# Altium PCB PCB1.PcbDoc
Units mm, origin at the board's own origin, x right, y up, seen from the top; angles counter-clockwise.
Board outline 16.45 x 26.8 mm, 2 copper layers (Top Layer, Bottom Layer), stack 1.671 mm thick; 25 components, 22 nets, 120 pads, 23 vias.
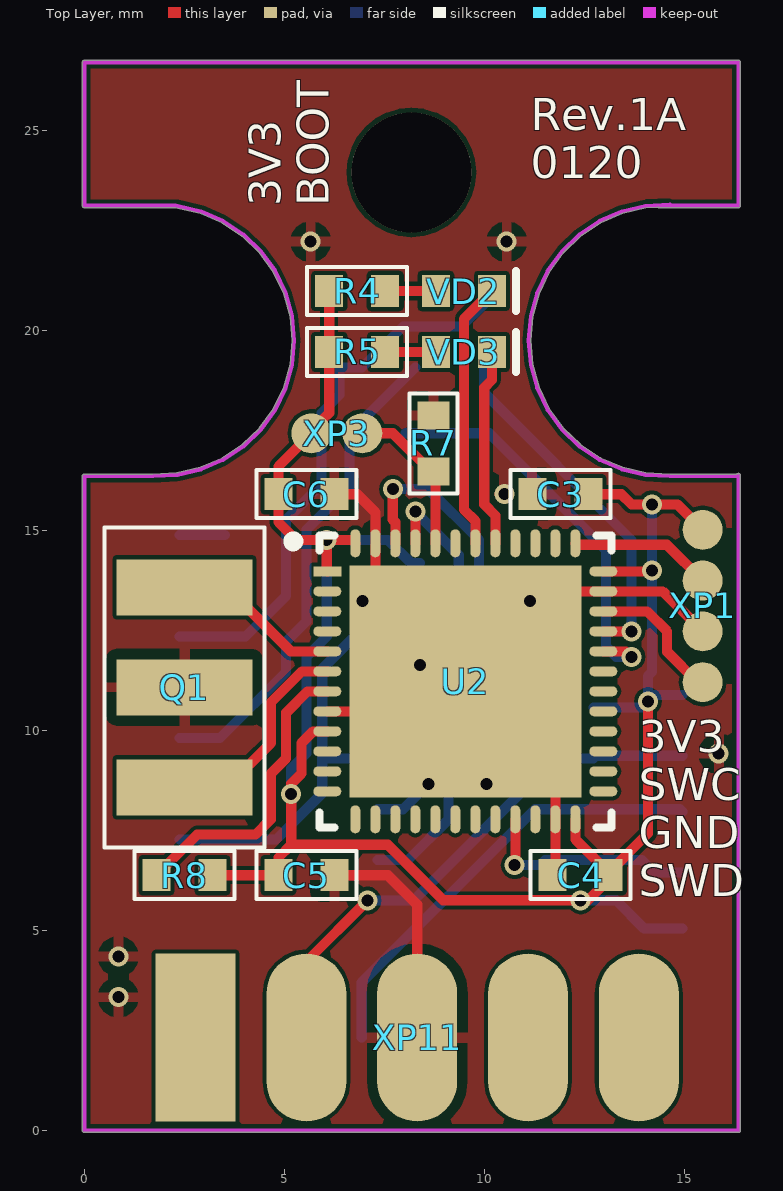
[diagram p0: Top Layer view]
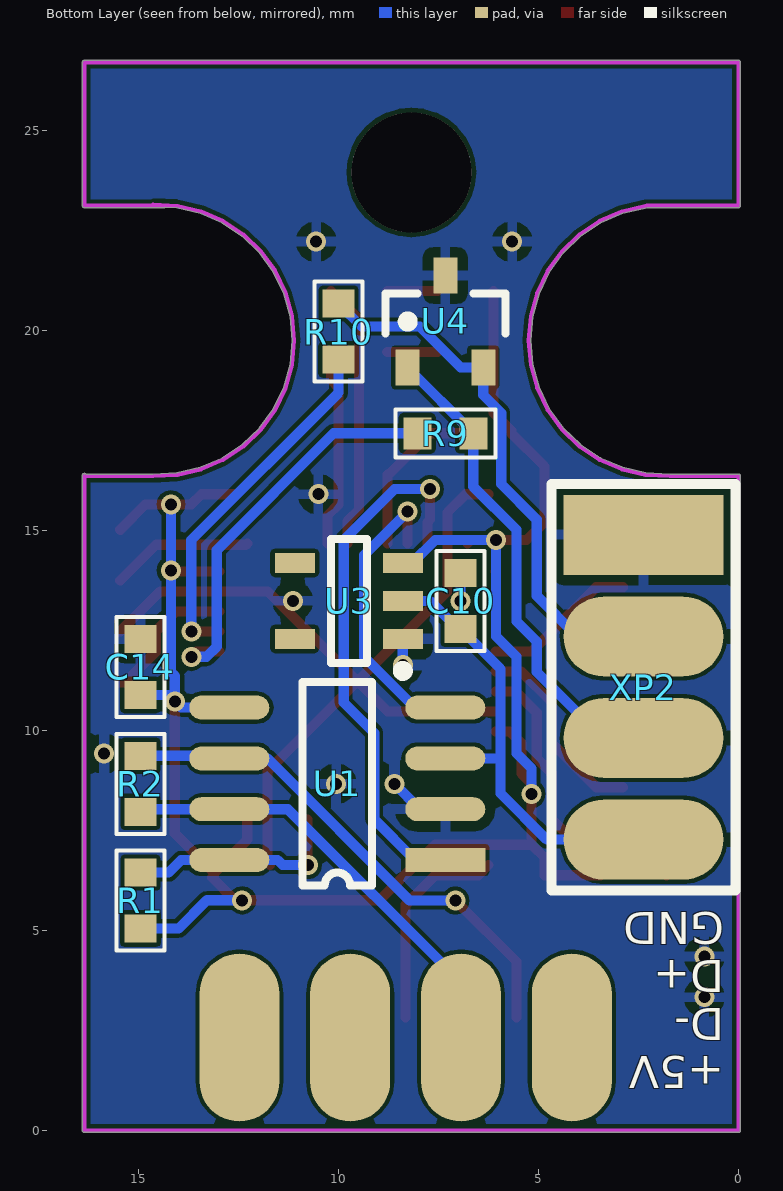
[diagram p1: Bottom Layer view, seen from below]

## Layer stack, top to bottom
Top Solder: solder mask 0.0102, Solder Resist, Dk 3.5
Top Layer: signal copper 0.0356
Dielectric 1: core 1.6, FR-4, Dk 4.2
Bottom Layer: signal copper 0.0356
Bottom Solder: solder mask 0.0102, Solder Resist, Dk 3.5

## Board outline
-0.058,16.358 cw(c-0.008,16.358) -0.008,16.409 1.706,16.409 2.306,16.439 2.888,16.574 3.437,16.811 3.935,17.142 4.365,17.556 4.716,18.04 4.974,18.579 5.132,19.155 5.186,19.75 5.132,20.345 4.974,20.921 4.716,21.46 4.365,21.944 3.935,22.358 3.437,22.689 2.888,22.926 2.267,23.071 -0.008,23.071 cw(c-0.008,23.121) -0.058,23.121 -0.058,26.7 cw(c-0.008,26.7) -0.008,26.75 16.342,26.75 cw(c16.342,26.7) 16.392,26.7 16.392,23.121 cw(c16.342,23.121) 16.342,23.071 14.35,23.071 cw(c14.35,23.121) 14.327,23.076 14.028,23.061 13.446,22.926 12.897,22.689 12.4,22.358 11.969,21.944 11.618,21.46 11.36,20.921 11.202,20.345 11.148,19.75 11.202,19.155 11.36,18.579 11.618,18.04 11.969,17.556 12.4,17.142 12.897,16.811 13.446,16.574 14.028,16.439 14.628,16.409 16.306,16.409 cw(c16.342,16.373) 16.392,16.373 16.392,0 cw(c16.342,0) 16.342,-0.05 -0.008,-0.05 cw(c-0.008,0) -0.058,0

## Design rules (kind name [scope] priority, off if disabled: settings)
BoardOutlineClearance [All] p1: gap=0.254 ignorepadtopadclearanceinfootprint=FALSE except(0: Arc-SplitContinuation Track-SplitContinuation SMDPad-SplitContinuation THPad-SplitContinuation Via-SplitContinuation Fill-SplitContinuation Poly-SplitContinuation Region-SplitContinuation Text-SplitContinuation; 0.1: SMDPad-OutlineEdge SMDPad-CavityEdge Poly-OutlineEdge Poly-CutoutEdge)
Clearance [All] p1: gap=0.1 ignorepadtopadclearanceinfootprint=TRUE except(0: Arc-Hole Track-Hole SMDPad-Hole THPad-Hole Via-Hole Fill-Hole Poly-Hole Region-Hole Text-Hole; 0.254: Fill-Fill Fill-Poly Fill-Region Fill-Text Poly-Poly Poly-Region Poly-Text Region-Region Region-Text Text-Text)
HoleSize [All] p1: absolutevalues=TRUE maxlimit=4 minlimit=0.3 maxpercent=80.000 minpercent=20.000
PolygonConnect [All] p1: connectstyle=Relief reliefconductorwidth=0.254 reliefentries=4 polygonreliefangle="90 Angle" airgapwidth=0.254
RoutingVias [All] p1: holewidth=0.3 width=0.5 viastyle="Through Hole" minholewidth=0.3 minwidth=0.5 maxholewidth=0.5 maxwidth=0.7
SolderMaskExpansion [All] p1: expansion=0.102
Width [All] p1: maxlimit=0.254 minlimit=0.254 preferedwidth=0.254
29 further rules are at their usual default settings.

## Classes and differential pairs
component class USB: R9 R10 U4 XP2
component class PWR: C10 C14 U3
component class MCU: C3 C4 C5 C6 Q1 R4 R5 R7 R8 U2 VD2 VD3 XP1 XP3
component class CAN: R1 R2 U1 XP11

## Components (designator, comment, footprint, x,y, rotation, side; value= is the part's Value field where it differs from the comment)
C3 "100nF" CAP_0603 11.892,15.905 r180 top
C4 "100nF" CAP_0603 12.4,6.38 r180 top
C5 "100nF" CAP_0603 5.542,6.38 r0 top
C6 "100nF" CAP_0603 5.542,15.905 r0 top
C10 "1uF" CAP_0603 6.939,13.238 r90 bottom
C14 "100nF" CAP_0603 14.94,11.587 r90 bottom value=100n
Q1 "CSTCC8M00G53A-R0" CSTCC-CRYSTAL 2.494,11.079 r270 top
R1 "10k" SMD_0603 14.94,5.745 r270 bottom
R2 "120" SMD_0603 14.94,8.666 r270 bottom
R4 "620" SMD_0603 6.812,20.985 r0 top
R5 "620" SMD_0603 6.812,19.461 r0 top
R7 "10k" SMD_0603 8.717,17.175 r270 top
R8 "10k" SMD_0603 2.494,6.38 r0 top
R9 "22" SMD_0603 7.32,17.429 r180 bottom
R10 "22" SMD_0603 9.987,19.969 r90 bottom
U1 "TJA1051" SO8-150mil 7.32,6.761 r0 bottom
U2 "STM32F072C8T6" QFN48-7X7-0.5 9.515,11.227 r0 top
U3 "MC78LC33NTRG" SOT753 9.733,13.238 r0 bottom
U4 "ESDA6V1L" SOT23-3 7.32,20.223 r90 bottom
VD2 "" LED_0603 9.479,20.985 r180 top
VD3 "" LED_0603 9.479,19.461 r180 top
XP1 "CON_4" HEAD_MICRO_SF_1.27-4 15.448,15.016 r270 top
XP2 "CON_4" HEAD-SMD-2.54/4 2.367,14.889 r180 bottom
XP3 "CON_2" HEAD_MICRO_SF_1.27-2 5.669,17.429 r0 top
XP11 "DB9M_CABLE" DSUB-9_M_EDGE 8.312,2.321 r0 top

## Footprints (in the part's own frame and the unit in brackets; to place one, negate y for a bottom-side part, rotate by r counter-clockwise, add the part's x,y. Pads: shape width x height; smd on the part's side, far side on the other; paste and mask are expansions set on the pad)
CAP_0603 [mm]
  rect 0.7x0.8 smd: 1(-0.7,0) 2(0.7,0)
  silkscreen extent -1.25,-0.6 1.25,0.6, body extent -0.8,-0.4 0.8,0.4, height 0.9
CSTCC-CRYSTAL [mm]
  rect 1.4x3.4 smd: 1(-2.5,0) 2(0,0) 3(2.5,0)
  silkscreen extent -4,-2 4,2, body extent -3.6,-1.5 3.6,1.5, height 1.25
DSUB-9_M_EDGE [mm]
  rect 2x4.2 smd: 1(-5.54,0)
  oval 2x4.2 smd: 2(-2.77,0) 3(0,0) 4(2.77,0) 5(5.54,0)
  oval 2x4.2 smd far side: 6(-4.155,0) 7(-1.385,0) 8(1.385,0) 9(4.155,0)
  body extent -15.41,-14.45 15.4,0.65, height 6.21
HEAD-SMD-2.54/4 [mm]
  rect 4x2 smd: 1(0,0)
  oval 4x2 smd: 2(0,-2.54) 3(0,-5.08) 4(0,-7.62)
  silkscreen extent -2.3,-8.89 2.3,1.27
HEAD_MICRO_SF_1.27-2 [mm]
  round 1 smd: 1(0,0) 2(1.27,0)
HEAD_MICRO_SF_1.27-4 [mm]
  round 1 smd: 1(0,0) 2(1.27,0) 3(2.54,0) 4(3.81,0)
LED_0603 [mm]
  rect 0.7x0.8 smd: 1(-0.7,0) 2(0.7,0)
  silkscreen extent -1.3,-0.5 -1.3,0.5, body extent -0.81,-0.4 0.81,0.4, height 0.6
QFN48-7X7-0.5 [mm]
  rect 0.7x0.25 smd: 1(-3.45,2.75)
  oval 0.7x0.25 smd: 2(-3.45,2.25) 3(-3.45,1.75) 4(-3.45,1.25) 5(-3.45,0.75) 6(-3.45,0.25) 7(-3.45,-0.25) 8(-3.45,-0.75) 9(-3.45,-1.25) 10(-3.45,-1.75) 11(-3.45,-2.25) 12(-3.45,-2.75) 25(3.45,-2.75) 26(3.45,-2.25) 27(3.45,-1.75) 28(3.45,-1.25) 29(3.45,-0.75) 30(3.45,-0.25) 31(3.45,0.25) 32(3.45,0.75) 33(3.45,1.25) 34(3.45,1.75) 35(3.45,2.25) 36(3.45,2.75)
  oval 0.25x0.7 smd: 13(-2.75,-3.45) 14(-2.25,-3.45) 15(-1.75,-3.45) 16(-1.25,-3.45) 17(-0.75,-3.45) 18(-0.25,-3.45) 19(0.25,-3.45) 20(0.75,-3.45) 21(1.25,-3.45) 22(1.75,-3.45) 23(2.25,-3.45) 24(2.75,-3.45) 37(2.75,3.45) 38(2.25,3.45) 39(1.75,3.45) 40(1.25,3.45) 41(0.75,3.45) 42(0.25,3.45) 43(-0.25,3.45) 44(-0.75,3.45) 45(-1.25,3.45) 46(-1.75,3.45) 47(-2.25,3.45) 48(-2.75,3.45)
  rect 5.8x5.8 smd: 49(0,0)
  silkscreen extent -4.42,-3.65 3.65,3.65, body extent -3.51,-3.51 3.51,3.51, height 0.79
SMD_0603 [mm]
  rect 0.7x0.8 smd: 1(-0.7,0) 2(0.7,0)
  silkscreen extent -1.25,-0.6 1.25,0.6, body extent -0.8,-0.4 0.8,0.4, height 0.45
SO8-150mil [mm]
  rect 2x0.6 smd: 1(0,0)
  oval 2x0.6 smd: 2(0,-1.27) 3(0,-2.54) 4(0,-3.81) 5(5.4,-3.81) 6(5.4,-2.54) 7(5.4,-1.27) 8(5.4,0)
  silkscreen extent 1.84,-4.44 3.56,0.64, body extent -0.36,-4.41 5.84,0.59, height 1.75
SOT23-3 [mm]
  rect 0.9x0.6 smd: 1(-1.15,0.95) 2(-1.15,-0.95) 3(1.15,0)
  silkscreen extent -0.3,-1.5 0.7,1.5, body extent -1.25,-1.5 1.25,1.5, height 1.05
SOT753 [mm]
  rect 1x0.5 smd: 1(-1.35,0.95) 2(-1.35,0) 3(-1.35,-0.95) 4(1.35,-0.95) 5(1.35,0.95)
  silkscreen extent -1.47,-1.55 0.45,1.87, body extent -1.25,-1.5 1.25,1.5, height 1.05

## Part data
C3 C4 C5 C6 C10 C14: library part C_NONE_POLAR, "None polar capacitor"
Q1: library part CRYSTAL_CAP, "Crystal oscillator", Model=CSTCC8M00G53A-R0
R1 R2 R4 R5 R7 R8 R9 R10: library part RES, "Resistor"
U2: "ARM Cortex-M0 32-bit MCU, 64 KB Flash, 8 KB Internal RAM, 39 I/Os, 48-pin LQFP, -40 to 85 degC, Tray", I/Os (High Current)=39, Operating Frequency(F) (Processor speed) (MHz)=48, PartNumber=STM32F030C8T6, Supplier Part Number 1=497-14043-ND, Supply Voltage(Vcc) min (V)=2.4, ComponentLink1Description="Manufacturer URL", ComponentLink1URL=http://www.st.com/web/en/home.html, ComponentLink2Description=Datasheet, ComponentLink2URL=http://www.st.com/st-web-ui/static/active/en/resource/technical/document/datasheet/DM00088500.pdf, ComponentLink3Description="Package Specification", ComponentLink3URL=http://www.st.com/st-web-ui/static/active/en/resource/technical/document/datasheet/DM00058181.pdf, Core="ARM Cortex-M0", DatasheetVersion="Rev. 1", FLASH Size (Prog) (kB)=64, Internal RAM Size (kB)=8, Mounting Technology="Surface Mount", PackageDescription="48-Pin Low Profile Quad Flat Package, 7 x 7 mm Body, 0.5 mm Pitch", PackageReference=LQFP48, PackageVersion="Rev. 6, 06/2013", Packing=Tray, Supplier 1=Digi-Key, Supplier 2=Newark, Supplier 3=Mouser, Supplier Part Number 2=06X3647, Supplier Part Number 3=511-STM32F030C8T6
U3: "Low dropout Linear Voltage Regulator"
U4: library part CDSOT23-SM712
VD2 VD3: library part LED, "LED"
XP11: library part DB9F_EDGE

## Free pads (board coordinates)
  round 3 hole 3 unplated: 1(8.167,23.95)

## Via types
v1: diameter 0.5, hole 0.3, Top Layer to Bottom Layer, tented both sides, 23 vias

## Nets (pads, with @x,y where several pads share a name; then routed paths per layer and width w, separated by ;. In a path a pad name is that pad's centre, name@x,y a point inside that pad or via, vN(x,y) a via of type N, cw(c..) or ccw(c..) an arc to the next point about the centre after c; other vN are vias at no path point)
+3V3: C3.1 C4.1 C5.1 C6.1 C14.1 R1.2 R4.1 R5.1 R8.2 U1.5 U2.1 U2.9 U2.24 U2.36 U2.48 U3.3 XP1.1 XP3.1 | length 54.7
  Top Layer w0.254: R8.2@3.194,6.634 3.448,6.38 4.78,6.38 C5.1@4.842,6.442 ; C5.1 C5.1@4.842,6.442 ; U2.9 5.71,9.977 5.415,9.682 5.415,8.92 5.161,8.666 v1(5.161,8.412) 5.161,7.142 ; U2.1 6.05,13.992 v1(6.05,14.762) ; R4.1 R5.1 6.112,17.937 5.669,17.494 XP3.1 4.842,16.602 C6.1 4.842,15.208 5.288,14.762 v1(6.05,14.762) ; U2.48 6.68,14.762 v1(6.05,14.762) ; U2.24 12.273,7.769 12.273,7.269 13.099,6.443 14.082,7.427 v1(14.082,10.729) ; C3.1 13.416,15.905 13.67,15.651 v1(14.178,15.651) 14.813,15.651 XP1.1 ; U2.36 14.155,13.977 v1(14.178,14) ; C4.1@13.1,6.634 C4.1 13.154,6.326 12.581,5.753 v1(12.4,5.753) 8.963,5.753 7.574,7.142 5.161,7.142 ; C5.1@4.842,6.442 4.842,6.823 5.161,7.142
  Bottom Layer w0.254: v1(5.161,8.412) 5.161,9.047 5.542,9.428 5.542,11.841 6.05,12.349 v1(6.05,14.762) 7.574,14.762 8.148,14.188 U3.3 ; v1(12.4,5.753) 13.281,5.753 13.989,5.045 R1.2 ; U1.5 13.924,10.571 v1(14.082,10.729) ; v1(14.178,15.651) v1(14.178,14) 14.178,11.46 14.082,11.364 v1(14.082,10.729) ; C14.1 14.24,10.887 v1(14.082,10.729)
+5V: C10.1 U1.3 U3.2 XP2.4 | length 11.7
  Bottom Layer w0.254: XP2.4 4.78,7.269 5.939,8.428 5.939,11.538 C10.1 7.001,12.538 7.701,13.238 U3.2 ; 5.939,9.301 U1.3
CAN_H: R2.2 U1.7 XP11.7 | length 11.2
  Bottom Layer w0.254: XP11.7 6.927,3.701 11.257,8.031 U1.7 14.875,8.031 R2.2
CAN_L: R2.1 U1.6 XP11.2 | length 12.9
  Top Layer w0.254: XP11.2@5.542,2.824 5.542,4.221 v1(7.066,5.745)
  Bottom Layer w0.254: v1(7.066,5.745) 8.209,5.745 11.765,9.301 U1.6 12.785,9.366 R2.1
CAN_RX: U1.4 U2.45 | length 7.4
  Top Layer w0.254: U2.45 v1(8.265,15.468)
  Bottom Layer w0.254: U1.4 8.082,10.571 9.352,11.841 9.352,14.381 v1(8.265,15.468)
CAN_S: R1.1 U1.8 U2.21 | length 5.5
  Top Layer w0.254: v1(10.749,6.634) 10.765,6.65 U2.21
  Bottom Layer w0.254: v1(10.749,6.634) 11.384,6.634 11.511,6.761 U1.8 13.924,6.761 14.24,6.445 R1.1
CAN_TX: U1.1 U2.46 | length 13.6
  Top Layer w0.254: v1(7.701,16.032) 7.701,15.27 7.765,15.206 U2.46
  Bottom Layer w0.254: U1.1 8.082,6.761 9.098,7.777 9.098,9.936 9.86,10.698 9.86,14.762 8.59,16.032 v1(7.701,16.032)
D+: R10.2 U4.2 XP2.2 | length 13.6
  Bottom Layer w0.254: XP2.2 4.018,12.349 5.034,13.365 5.034,15.27 5.923,16.159 5.923,17.937 6.37,18.384 U4.2 6.932,19.073 7.955,20.096 9.414,20.096 R10.2
D-: R9.2 U4.1 XP2.3 | length 12.3
  Bottom Layer w0.254: XP2.3 3.383,9.809 5.034,11.46 5.034,12.222 5.542,12.73 5.542,15.016 6.62,16.094 R9.2 8.264,19.073 U4.1
GND: C3.2 C4.2 C5.2 C6.2 C10.2 C14.2 Q1.2 R7.1 U1.2 U2.8 U2.23 U2.35 U2.47 U2.49 U3.1 U4.3 XP1.3 XP2.1 XP11.3 | length 32.4
  Top Layer w0.254: U2.8 8.765,10.477 U2.49 ; C5.2@6.242,6.634 6.496,6.38 7.574,6.38 8.312,5.642 XP11.3@8.312,2.824 ; C6.2 6.812,15.905 7.265,15.452 U2.47 7.265,13.477 U2.49 ; v1@10.368,15.905 v1(10.495,15.905) ; C4.2@11.7,6.634 11.765,6.699 U2.23 11.765,8.977 U2.49 ; XP1.3 14.447,13.477 U2.35 11.765,13.477 U2.49
  Bottom Layer w0.254: XP2.1 XP2.1@3.51,14.889 ; v1(6.939,13.238) C10.2 ; U1.2 7.955,8.031 v1(8.59,8.666) ; v1(8.383,11.634) U3.1
  other v1: 0.843,3.332 0.843,4.348 10.05,8.666 15.85,9.421 11.13,13.238 5.65,22.221 10.55,22.221
LED1: U2.41 VD3.1 | length 5
  Top Layer w0.254: VD3.1 10.179,18.761 9.987,18.569 9.987,15.651 10.265,15.373 U2.41
LED2: U2.42 VD2.1 | length 6.7
  Top Layer w0.254: U2.42 9.765,15.238 9.479,15.524 9.479,20.285 VD2.1
NetR4_2: R4.2 VD2.2 | length 1.3
  Top Layer w0.254: R4.2 VD2.2
NetR5_2: R5.2 VD3.2 | length 1.3
  Top Layer w0.254: R5.2 VD3.2
NetR7_2: R7.2 U2.44 XP3.2 | length 4
  Top Layer w0.254: XP3.2 7.701,17.429 8.734,16.396 8.765,16.396 U2.44
NetR8_1: R8.1 U2.7 | length 7.5
  Top Layer w0.254: R8.1 2.81,7.396 4.272,7.396 4.653,7.777 4.653,8.92 5.034,9.301 5.034,10.444 5.567,10.977 U2.7
OSC_8_IN: Q1.1 U2.5 | length 3.9
  Top Layer w0.254: Q1.1@2.875,13.579 3.55,13.579 5.152,11.977 U2.5
OSC_8_OUT: Q1.3 U2.6 | length 5
  Top Layer w0.254: Q1.3@2.875,8.579 3.55,8.579 4.653,9.682 4.653,10.698 5.432,11.477 U2.6
SWCLK: U2.37 XP1.2 | length 3.6
  Top Layer w0.254: U2.37 12.299,14.643 14.551,14.643 XP1.2
SWDIO: U2.34 XP1.4 | length 3.5
  Top Layer w0.254: U2.34 14.058,12.977 14.559,12.476 14.559,11.968 15.321,11.206 XP1.4
USB_DM: R9.1 U2.32 | length 10.1
  Top Layer w0.254: U2.32 13.534,11.977 v1(13.67,11.841)
  Bottom Layer w0.254: R9.1 10.114,17.429 13.035,14.508 13.035,12.095 13.289,11.841 v1(13.67,11.841)
USB_DP: R10.1 U2.33 | length 9
  Top Layer w0.254: U2.33 v1(13.67,12.476) v1(13.67,12.476)
  Bottom Layer w0.254: R10.1 9.987,18.445 13.67,14.762 v1(13.67,12.476)
pads on no net: U2.2 U2.3 U2.4 U2.10 U2.11 U2.12 U2.13 U2.14 U2.15 U2.16 U2.17 U2.18 U2.19 U2.20 U2.22 U2.25 U2.26 U2.27 U2.28 U2.29 U2.30 U2.31 U2.38 U2.39 U2.40 U2.43 U3.4 U3.5 XP11.1 XP11.4 XP11.5 XP11.6 XP11.8 XP11.9

## Polygon pours and split planes (outlines as drawn)
GND on Top Layer "Top Layer-GND" (solid, pour order 0): -1.824,-2.002 20.02,-2.002 20.274,-1.748 19.766,-1.24 19.766,27.462 -1.697,27.462 -1.824,27.335
GND on Bottom Layer "Bottom-GND" (solid, pour order 2): -1.189,27.208 -1.316,27.081 -1.316,-0.478 17.353,-0.478 17.861,0.03 17.861,27.335 -1.189,27.335

## Keep-outs
Keep-Out Layer:
  lines w0.1: 0.007,16.358 1.708,16.358 2.313,16.388 2.904,16.526 3.461,16.767 3.966,17.102 4.403,17.523 4.759,18.014 5.021,18.561 5.182,19.146 5.236,19.75 5.182,20.354 5.021,20.939 4.759,21.486 4.403,21.977 3.966,22.398 3.461,22.733 2.904,22.974 2.273,23.121 1.841,23.121 -0.008,23.121 -0.008,26.7 16.342,26.7 16.342,23.121 ; 0.266,16.358 -0.008,16.358 -0.008,0 16.342,0 16.342,16.373 ; 14.35,23.121 16.342,23.121 ; 14.626,23.142 14.021,23.112 13.43,22.974 12.873,22.733 12.368,22.398 11.931,21.977 11.575,21.486 11.313,20.939 11.152,20.354 11.098,19.75 11.152,19.146 11.313,18.561 11.575,18.014 11.931,17.523 12.368,17.102 12.873,16.767 13.43,16.526 14.021,16.388 14.626,16.358 16.327,16.358 ; 16.047,23.121 16.342,23.121

## Silkscreen, mask and mechanical layers (free items; w line width, h text height)
Top Overlay:
  text "Rev.1A / 0120" at 11.15,23.8 h0.8
  text "3V3 / BOOT" at 6.1,23.1 h0.8 r90
  text "3V3 / SWC / GND / SWD" at 13.85,5.85 h0.8
Bottom Overlay:
  text "+5V / D- / D+ / GND" at 0.35,5.45 h0.8 r180
Drill Drawing:
  circle w0.254: c-11.794,43.921 r0.847
  lines w0.254: -12.641,39.265 -10.947,39.265 -10.947,40.958 -12.641,40.958 -12.641,39.265
  lines w0.381: -14.159,38.122 255.615,38.122 ; -14.159,45.742 255.615,45.742 ; -0.167,34.312 -0.167,49.552 ; 13.545,34.312 13.545,49.552 ; 42.493,34.312 42.493,49.552 ; 55.342,34.312 55.342,49.552 ; 73.981,34.312 73.981,49.552 ; 112.069,34.312 112.069,49.552 ; 127.051,34.312 127.051,49.552 ; 145.995,34.312 145.995,49.552 ; 165.039,34.312 165.039,49.552 ; 186.725,34.312 186.725,49.552 ; 220.599,34.312 220.599,49.552 ; -14.159,34.312 255.615,34.312 255.615,49.552 -14.159,49.552 -14.159,34.312
  text "Symbol" at -11.873,46.885 h1.83
  text "Count" at 0.976,46.885 h1.83
  text "Hole Size" at 14.688,46.885 h1.83
  text "Plated" at 43.636,46.885 h1.83
  text "Hole Type" at 56.485,46.885 h1.83
  text "Drill Layer Pair" at 75.124,46.885 h1.83
  text "Via/Pad" at 113.212,46.885 h1.83
  text "Pad Shape" at 128.194,46.885 h1.83
  text "Template" at 147.138,46.885 h1.83
  text "Description" at 166.182,46.885 h1.83
  text "Hole Tolerance (+)" at 187.868,46.885 h1.83
  text "Hole Tolerance (-)" at 221.742,46.885 h1.83
  text "1" at 0.976,43.075 h1.52
  text "3,000mm (118,11mil)" at 14.688,43.075 h1.52
  text "NPTH" at 43.636,43.075 h1.52
  text "Round" at 56.485,43.075 h1.52
  text "Top Layer - Bottom Layer" at 75.124,43.075 h1.52
  text "Pad" at 113.212,43.075 h1.52
  text "Rounded" at 128.194,43.075 h1.52
  text "c300hn300" at 147.138,43.075 h1.52
  text "23" at 0.976,39.265 h1.52
  text "0,300mm (11,81mil)" at 14.688,39.265 h1.52
  text "PTH" at 43.636,39.265 h1.52
  text "Round" at 56.485,39.265 h1.52
  text "Top Layer - Bottom Layer" at 75.124,39.265 h1.52
  text "Via" at 113.212,39.265 h1.52
  text "Rounded" at 128.194,39.265 h1.52
  text "v50h30m0mx0" at 147.138,39.265 h1.52
  text "24 Total" at 0.976,35.455 h1.52